# Altium PCB PCB.PcbDoc
Units mm, origin at the board's own origin, x right, y up, seen from the top; angles counter-clockwise.
Board outline 20 x 20 mm, 2 copper layers (Top Layer, Bottom Layer), stack 1.671 mm thick; 5 components, 4 nets, 10 pads, 1 vias.
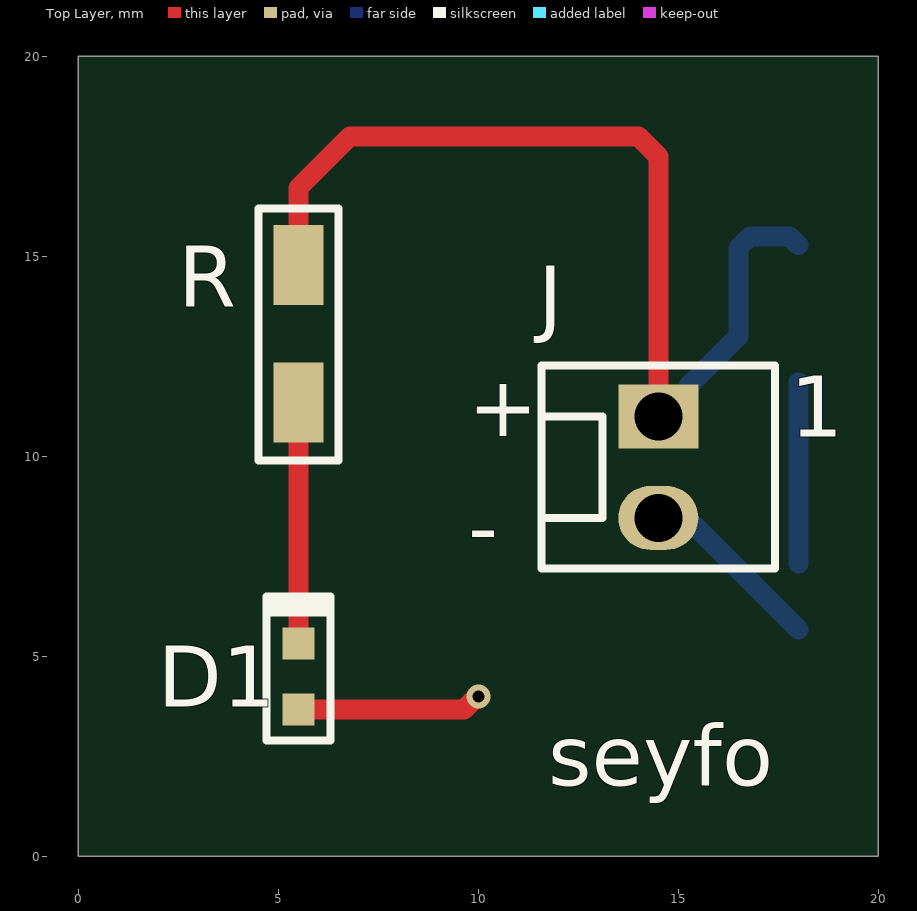
[diagram p0: Top Layer view]
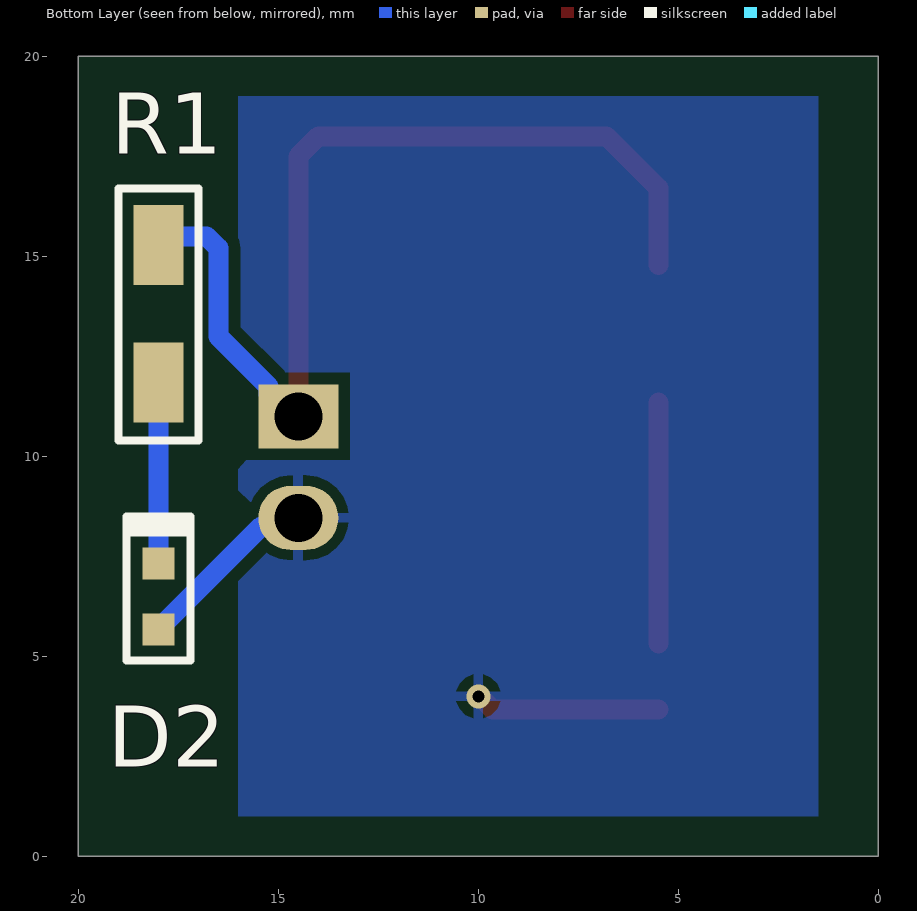
[diagram p1: Bottom Layer view, seen from below]
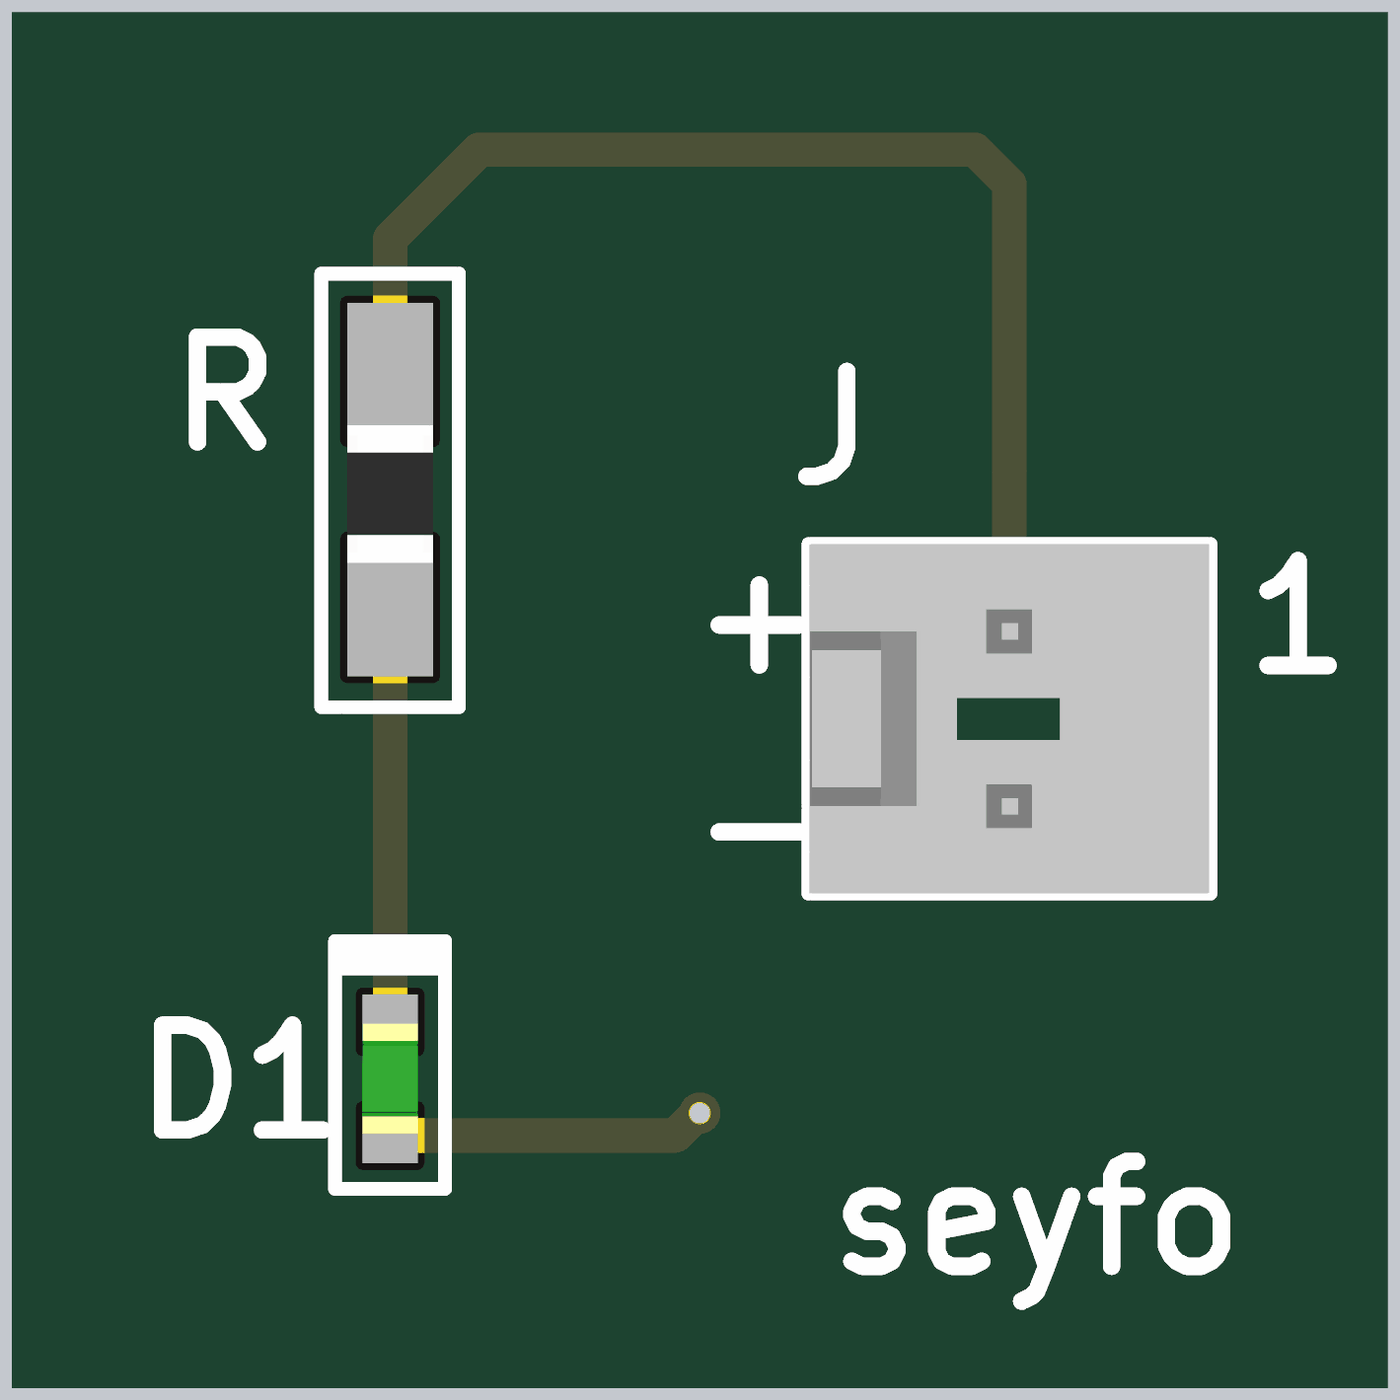
[diagram p2: 3D render of the assembled board from above, using the file's embedded part models]

## Layer stack, top to bottom
Top Solder: solder mask 0.0102, Solder Resist, Dk 3.5
Top Layer: signal copper 0.0356
Dielectric 1: dielectric 1.6, FR-4, Dk 4.8
Bottom Layer: signal copper 0.0356
Bottom Solder: solder mask 0.0102, Solder Resist, Dk 3.5

## Board outline
0,0 20,0 20,20 0,20

## Design rules (kind name [scope] priority, off if disabled: settings)
Clearance [All] p1: gap=0.3 ignorepadtopadclearanceinfootprint=FALSE
PolygonConnect [All] p1: connectstyle=Relief reliefconductorwidth=0.254 reliefentries=4 polygonreliefangle="90 Angle" airgapwidth=0.254
RoutingVias [All] p1: holewidth=0.3 width=0.6 viastyle="Through Hole" minholewidth=0.3 minwidth=0.6 maxholewidth=0.3 maxwidth=6
SolderMaskExpansion [All] p1: expansion=0.102 istentingtop=FALSE
SupplyNets "Schematic Supply Nets_1" [InNet('GND')] p1: voltage=0.000
SupplyNets "Schematic Supply Nets" [InNet('+3V3')] p2: voltage=0.000
Width [All] p1: maxlimit=1 minlimit=0.3 preferedwidth=0.5
30 further rules are at their usual default settings.

## Components (designator, comment, footprint, x,y, rotation, side; value= is the part's Value field where it differs from the comment)
D1 "Led-Green" LED0603G 5.5,4.5 r270 top
D2 "Led-Green" LED0603G 18,6.5 r270 bottom
J "1x2Header" HDR1X2 14.5,11 r0 top
R "360R" R805 5.5,13 r90 top
R1 "360R" R805 18,13.5 r90 bottom

## Footprints (in the part's own frame and the unit in brackets; to place one, negate y for a bottom-side part, rotate by r counter-clockwise, add the part's x,y. Pads: shape width x height; smd on the part's side, far side on the other; paste and mask are expansions set on the pad)
HDR1X2 [mm]
  rect 2x1.6 hole 1.2: 1(0,0)
  oval 2x1.6 hole 1.2: 2(0,-2.54)
  silkscreen extent -2.92,-3.81 2.92,1.27, body extent -2.92,-3.81 2.93,1.27, height 11.07
LED0603G [mm]
  rect 0.8x0.8 smd: 1(-0.825,0) 2(0.825,0)
  silkscreen extent -2,-0.8 1.6,0.8, body extent -0.8,-0.4 0.8,0.4, height 0.4
R805 [mm]
  rect 2x1.25 smd: 1(-1.651,0) 2(1.778,0)
  silkscreen extent -3.1,-1 3.2,1, body extent -1,-0.63 1,0.63, height 0.61

## Part data
D1 D2: library part 150060GS75000, "Single Color LED, Green, Water Clear, 1.1mm", Color=Green, Forward Current=30mA, Manufacturer="Wurth Electronics", Max Operating Temperature=85°C, Min Operating Temperature=-40°C, Supplier Part Number=732-4971-1-ND, Category=LEDs, Channels=1, ComponentLink1Description=https://datasheet.ciiva.com:443/pdfs/VipMasterIC/IC/MIDC/MIDC-S-A0007790169/MIDC-S-A0007790169-1.pdf?src-supplier=IHS+Markit, ComponentLink1URL=https://datasheet.ciiva.com:443/pdfs/VipMasterIC/IC/MIDC/MIDC-S-A0007790169/MIDC-S-A0007790169-1.pdf?src-supplier=IHS+Markit, ComponentLink2Description=https://datasheet.ciiva.com/29562/150060gs75000-29562868.pdf?src-supplier=Digikey, ComponentLink2URL=https://datasheet.ciiva.com/29562/150060gs75000-29562868.pdf?src-supplier=Digikey, ComponentLink3Description=https://datasheet.ciiva.com/29279/759427-da-01-en-chipled-0603-w-kl-gruen-150060gs75000-29279201.pdf?src-supplier=Conrad, ComponentLink3URL=https://datasheet.ciiva.com/29279/759427-da-01-en-chipled-0603-w-kl-gruen-150060gs75000-29279201.pdf?src-supplier=Conrad, ComponentLink4Description=https://datasheet.ciiva.com/29562/150060gs75000-29562869.pdf?src-supplier=Digikey, ComponentLink4URL=https://datasheet.ciiva.com/29562/150060gs75000-29562869.pdf?src-supplier=Digikey, ComponentLink5Description=https://datasheet.ciiva.com/29562/150060gs75000-29562870.pdf?src-supplier=Digikey, ComponentLink5URL=https://datasheet.ciiva.com/29562/150060gs75000-29562870.pdf?src-supplier=Digikey, Lens Style="WATER CLEAR", Luminous Intensity-Nom=430mcd, Manufacturer Part Number=150060GS75000, Mounting Technology="Surface Mount", Optoelectronic Device Type="SINGLE COLOR LED", Overall Height=0.7mm, Packaging="Tape and Reel", Pins=2, Pricing="1=0.15, 50=0.142, 100=0.122, 500=0.105 (USD)", Reach SVHC Compliant=Yes, RoHS=Yes, RoHS Compliant=Yes, Shape=Rectangular, Size=1.1mm, Stock=77230, Supplier=Digikey, Terminal Pitch=1.6mm, Viewing Angle=140°
J: library part 22-29-2021, "Board Connector, 2 Contact(s), 1 Row(s), Male, Straight, 0.1 inch Pitch, Solder Terminal, Locking, White Insulator, Receptacle", Contact Resistance=10mR, Flammability Rating="UL94 V-0", Insulation Color=White, Insulation Resistance=1GR, Manufacturer=Molex, Max Operating Temperature=75°C, Min Operating Temperature=0°C, Rated Current (Signal)=4A, Supplier Part Number=WM2744-ND, Body Breadth=0.23inch, Body Depth=0.46inch, Body Length=0.2inch, Body/Shell Style=RECEPTACLE, Category=Connectors, ComponentLink1Description=https://datasheet.ciiva.com:443/pdfs/VipMasterIC/IC/MOLE/MOLE-E-A0003552261/MOLE-S-A0003534498-1.pdf?src-supplier=IHS+Markit, ComponentLink1URL=https://datasheet.ciiva.com:443/pdfs/VipMasterIC/IC/MOLE/MOLE-E-A0003552261/MOLE-S-A0003534498-1.pdf?src-supplier=IHS+Markit, Connector Type="BOARD CONNECTOR", Contact Finish - Mating=GOLD, Contact Finish - Termination="Gold (Au)", Contact Gender=Male, Contact Pattern=RECTANGULAR, Contact Style="SQ PIN-SKT", DIN Conformance=No, Durability=25Cycles, Filter Feature=No, IEC Conformance=No, Insulation Material=Nylon, JESD-609 Code=e4, Manufacturer Part Number=22-29-2021, Mating Contact Pitch=0.1inch, Mating Information="MULTIPLE MATING PARTS AVAILABLE", MIL Conformance=No, Mixed Contacts=No, Mounting Option 1=LOCKING, Mounting Style=STRAIGHT, Mounting Technology=Board, Number Of Connectors=1, Number of Contacts=2, Number Of PCB Rows=1, Number of Rows Loaded=1, Option="General Purpose", PCB Contact Pattern=RECTANGULAR, Plating Thickness=20uin, Polarization Key="POLARIZED HOUSING", Pricing="1=0.34, 10=0.286, 100=0.2225, 3000=0.18654 (USD)", Reach SVHC Compliant=Yes, Reference Standard=UL, Reliability=COMMERCIAL, RoHS=Yes, RoHS Compliant=Yes, Supplier=Digikey, Terminal Length=0.14inch, Terminal Pitch=2.54mm, Termination=Solder
R R1: library part RC0805JR-07360RL, "Fixed Resistor, Metal Glaze/thick Film, 0.125W, 360ohm, 150V, 5% +/-Tol, 100ppm/Cel, Surface Mount, 0805", Case/Package=0805, Manufacturer=Yageo, Max Operating Temperature=155°C, Min Operating Temperature=-55°C, Package Height=0.5mm, Package Length=2mm, Package Shape=Rectangular, Package Style=SMTMeter, Package Width=1.25mm, Power=125mW, Rated Temperature=70°C, Resistor Type="FIXED RESISTOR", Supplier Part Number=311-360ARCT-ND, Temperature Coefficient=100ppm/°C, Tolerance=5%, Working Voltage=150V, Additional Feature="LASER TRIMMABLE", Category="Chip SMD Resistors", ComponentLink1Description=https://datasheet.ciiva.com:443/pdfs/VipMasterIC/IC/YAGO/YAGO-S-A0008145938/YAGO-S-A0008145938-1.pdf?src-supplier=IHS+Markit, ComponentLink1URL=https://datasheet.ciiva.com:443/pdfs/VipMasterIC/IC/YAGO/YAGO-S-A0008145938/YAGO-S-A0008145938-1.pdf?src-supplier=IHS+Markit, ComponentLink2Description=https://datasheet.ciiva.com/2508/pyu-r-int-thick-7-2508741.pdf?src-supplier=Digikey, ComponentLink2URL=https://datasheet.ciiva.com/2508/pyu-r-int-thick-7-2508741.pdf?src-supplier=Digikey, ComponentLink3Description=https://datasheet.ciiva.com/2508/pyu-r-int-thick-7-2508742.pdf?src-supplier=Digikey, ComponentLink3URL=https://datasheet.ciiva.com/2508/pyu-r-int-thick-7-2508742.pdf?src-supplier=Digikey, ComponentLink4Description=https://datasheet.ciiva.com/2508/pyu-r-int-thick-7-2508743.pdf?src-supplier=Digikey, ComponentLink4URL=https://datasheet.ciiva.com/2508/pyu-r-int-thick-7-2508743.pdf?src-supplier=Digikey, ComponentLink5Description=https://datasheet.ciiva.com/16745/rc0805-16745688.pdf?src-supplier=Future+Electronics, ComponentLink5URL=https://datasheet.ciiva.com/16745/rc0805-16745688.pdf?src-supplier=Future+Electronics, Construction=Chip, JESD-609 Code=e3, Manufacturer Part Number=RC0805JR-07360RL, Mounting Technology="Surface Mount", Packaging="Tape and Reel", Pins=2, Pricing="1=0.1, 10=0.023, 50=0.0144, 100=0.012, 500=0.00818, 1000=0.00706 (USD)", Reach SVHC Compliant=Yes, RoHS=Yes, RoHS Compliant=Yes, Stock=128634, Supplier=Digikey, Technology="METAL GLAZE/THICK FILM", Terminal Finish=Nickel, Termination=Wraparound

## Via types
v1: diameter 0.6/0.6 (per signal layer), hole 0.3, Top Layer to Bottom Layer, tented both sides, 1 vias

## Nets (pads, with @x,y where several pads share a name; then routed paths per layer and width w, separated by ;. In a path a pad name is that pad's centre, name@x,y a point inside that pad or via, vN(x,y) a via of type N, cw(c..) or ccw(c..) an arc to the next point about the centre after c; other vN are vias at no path point)
+3V3: J.1 R1.2 R.2 | length 25
  Top Layer w0.5: R.2 5.5,16.707 6.793,18 14,18 14.5,17.5 J.1
  Bottom Layer w0.5: J.1 14.7,11 15.25,11.55 15.25,11.75 16.5,13 16.5,15.207 16.793,15.5 17.778,15.5 R1.2
Diode: D1.1 R.1 | length 6
  Top Layer w0.5: D1.1 R.1
Diode2: D2.1 R1.1 | length 4.5
  Bottom Layer w0.5: D2.1 R1.1
GND: D1.2 D2.2 J.2 | length 9.3
  Top Layer w0.5: D1.2 9.648,3.675 9.973,4 v1(10,4)
  Bottom Layer w0.5: J.2 14.71,8.25 15.425,8.25 D2.2

## Polygon pours and split planes (outlines as drawn)
GND on Bottom Layer "GND_L02_P000" (solid, pour order 0): 1.5,19 1.5,1 16,1 16,19

## Silkscreen, mask and mechanical layers (free items; w line width, h text height)
Top Overlay:
  text "+" at 9.754,10.5 h1.52
  text "-" at 9.754,7.492 h1.52
  text "seyfo" at 11.754,1.762 h1.52

## Text inside footprints (layer, text, board x,y; h text height)
J: Top Overlay "1" at 17.802,10.492 h1.52